# EAGLE board SWD_PROGRAMMER (EAGLE 6.5.0)
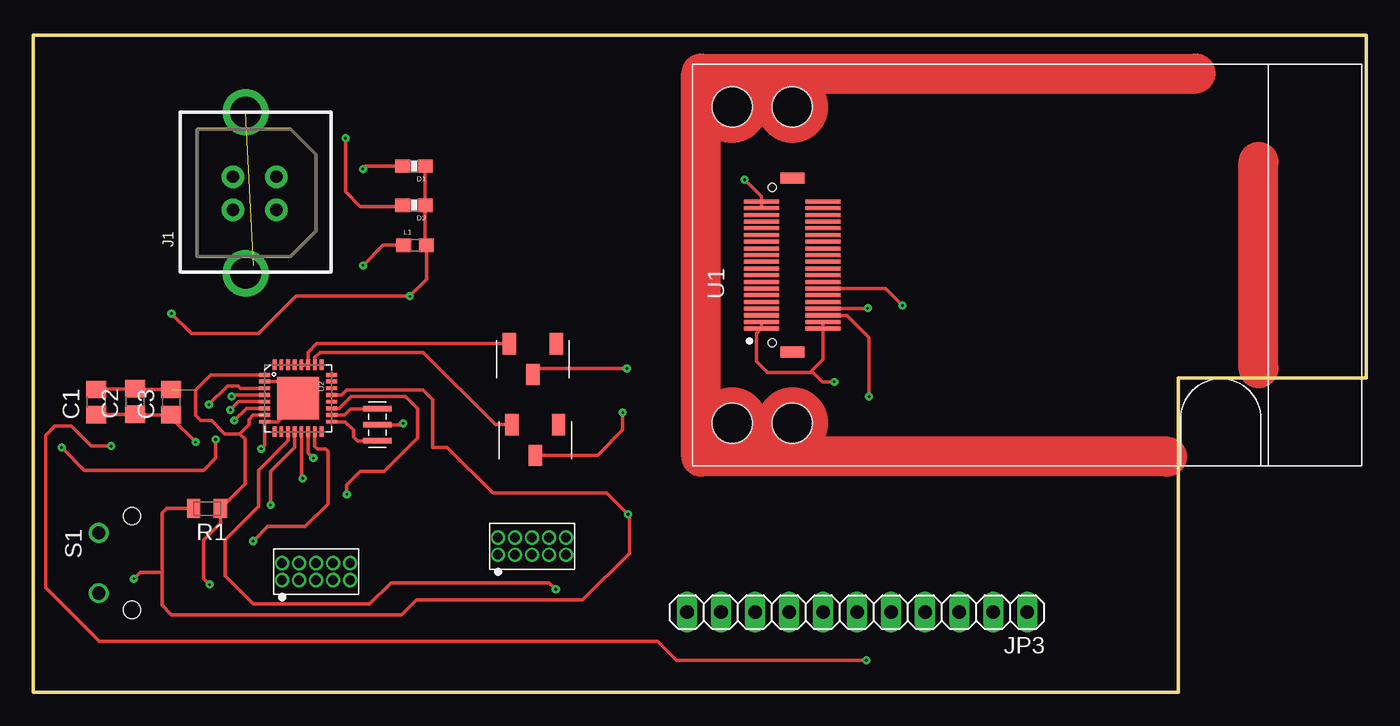
[diagram p0: board, top side]
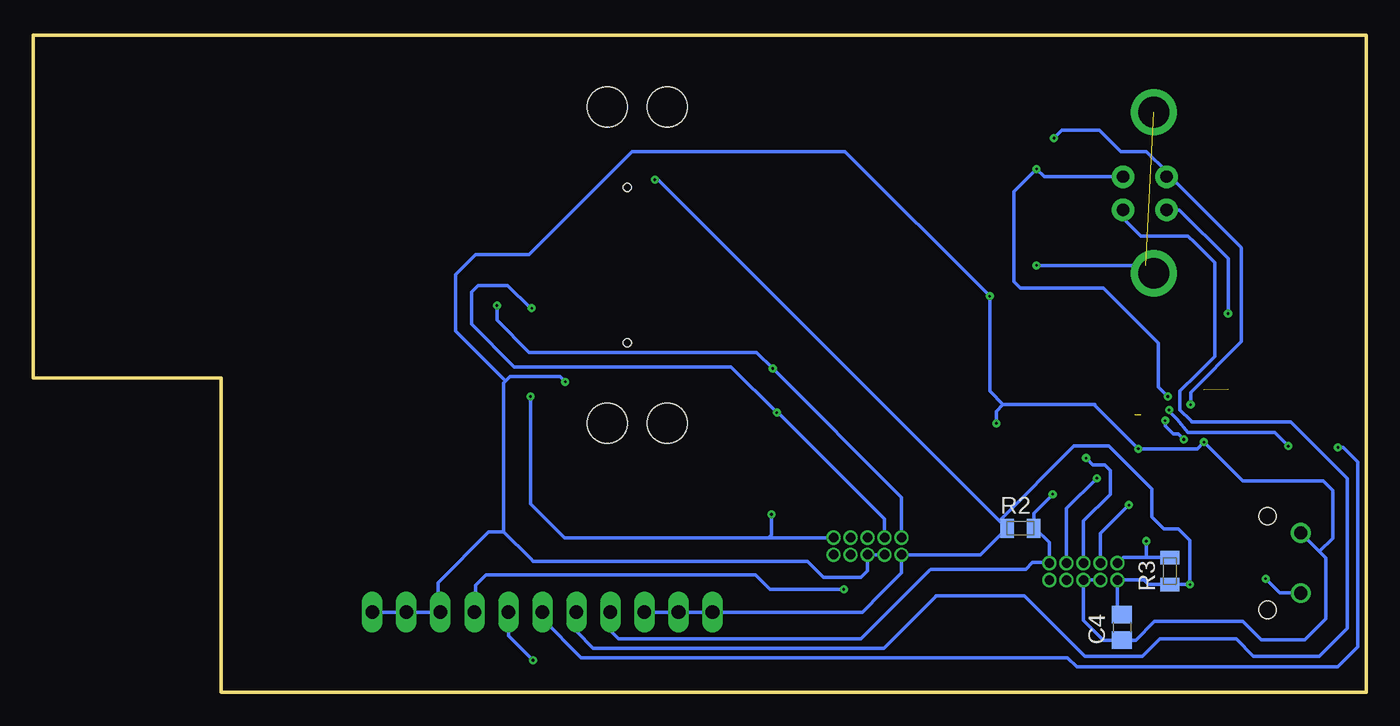
[diagram p1: board, bottom side, seen from below]

Size 99.5 x 49.1 mm. Coordinates in mm from the lower left corner, seen from the top.
Outline: 0,49.1 99.5,49.1 99.5,23.5 85.5,23.5 85.5,0 0,0 0,49.1
Copper layers (1*16): Top 0.035559375mm / dielectric 1.47mm / Bottom 0.035559375mm
Design rules "Codeshelf_Standard": minimum track width 0.2mm, minimum drill 0.25mm, track to track 0.2mm, track to pad 0.2mm, pad to pad 0.2mm, via to via 0.2mm, smd to smd 0mil, copper to edge 0.4mm, drill to drill 0.5mm, minimum pad ring 0.15mm, minimum via ring 0.2mm, stop-mask expansion 0.05mm, vias tented up to drill 0.5mm, thermal gap 0.25mm

## Footprints (pad centres in the part's own frame; a part is rotated, then mirrored left to right if it is on the bottom)
C0805 = smd 1.3 x 1.5: 1 -0.95,0; 2 0.95,0
0603-RES = smd 1.1 x 1: 1 -0.85,0; 2 0.85,0
USB-B-PTH-VERTICAL = drill 0.92 pad 1.676: D+ 4.826,3.95; D- 4.826,7.2; GND 7.315,3.95; VBUS 7.315,7.2 | drill 2.3: P$1 0,4.9; P$2 12.04,4.9
2X5HDR = drill 0.7 pad 1: P$1 -2.54,-0.67; P$2 -2.54,0.6; P$3 -1.27,-0.67; P$4 -1.27,0.6; P$5 0,-0.67; P$6 0,0.6; P$7 1.27,-0.67; P$8 1.27,0.6; P$9 2.54,-0.67; P$10 2.54,0.6
1X11 = drill 1.016 long: 1 -12.7,0; 2 -10.16,0; 3 -7.62,0; 4 -5.08,0; 5 -2.54,0; 6 0,0; 7 2.54,0; 8 5.08,0; 9 7.62,0; 10 10.16,0; 11 12.7,0
0603 = smd 1.1 x 1: 1 -0.85,0; 2 0.85,0
RF-C0805 = smd 1 x 1.4: 1 -1,0; 2 1,0
RA_BUTTON = drill 0.99: P$1 -2.25,0; P$2 2.25,0 | hole 1.3: -3.501,2.49; 3.501,2.49
CJS = smd 1 x 1.6: P$1 0,1.15; P$2 -1.75,-1.15; P$3 1.75,-1.15
BRAIN_OFFSET = smd 0.3 x 2.6: P$1 -4.75,2.3; P$2 -4.75,-2.3; P$3 -4.25,2.3; P$4 -4.25,-2.3; P$5 -3.75,2.3; P$6 -3.75,-2.3; P$7 -3.25,2.3; P$8 -3.25,-2.3; P$9 -2.75,2.3; P$10 -2.75,-2.3; P$11 -2.25,2.3; P$12 -2.25,-2.3; P$13 -1.75,2.3; P$14 -1.75,-2.3; P$15 -1.25,2.3; P$16 -1.25,-2.3; P$17 -0.75,2.3; P$18 -0.75,-2.3; P$19 -0.25,2.3; P$20 -0.25,-2.3; P$21 0.25,2.3; P$22 0.25,-2.3; P$23 0.75,2.3; P$24 0.75,-2.3; P$25 1.25,2.3; P$26 1.25,-2.3; P$27 1.75,2.3; P$28 1.75,-2.3; P$29 2.25,2.3; P$30 2.25,-2.3; P$31 2.75,2.3; P$32 2.75,-2.3; P$33 3.25,2.3; P$34 3.25,-2.3; P$35 3.75,2.3; P$36 3.75,-2.3; P$37 4.25,2.3; P$38 4.25,-2.3; P$39 4.75,2.3; P$40 4.75,-2.3 | smd 0.8 x 1.8: P$41 -6.5,0; P$42 6.5,0 | hole 0.6: -5.8,1.5; 5.8,1.5 | hole 3: -11.8,4.5; 11.8,4.5; -11.8,0; 11.8,0
QFN-32 = smd 0.285 x 0.8: 1 -1.75,-2.5; 2 -1.25,-2.5; 3 -0.75,-2.5; 4 -0.25,-2.5; 5 0.25,-2.5; 6 0.75,-2.5; 7 1.25,-2.5; 8 1.75,-2.5; 17 1.75,2.5; 18 1.25,2.5; 19 0.75,2.5; 20 0.25,2.5; 21 -0.25,2.5; 22 -0.75,2.5; 23 -1.25,2.5; 24 -1.75,2.5 | smd 0.8 x 0.285: 9 2.5,-1.75; 10 2.5,-1.25; 11 2.5,-0.75; 12 2.5,-0.25; 13 2.5,0.25; 14 2.5,0.75; 15 2.5,1.25; 16 2.5,1.75; 25 -2.5,1.75; 26 -2.5,1.25; 27 -2.5,0.75; 28 -2.5,0.25; 29 -2.5,-0.25; 30 -2.5,-0.75; 31 -2.5,-1.25; 32 -2.5,-1.75 | smd 3.15 x 3.15: EP 0,0
CSTCE_G_A = smd 0.4 x 2.1: P$1 -1.2,0; P$2 0,0; P$3 1.2,0

## Placement (x,y rotation side)
C1  10uF  [C0805]  4.69,21.68 90 top
C2  1uF  [C0805]  7.59,21.73 90 top
C3  0.1uF  [C0805]  10.29,21.68 90 top
C4  0.1uF  [C0805]  18.22,4.87 90 bottom
D1  TVS0603  [0603-RES]  28.41,39.31 180 top
D2  TVS0603  [0603-RES]  28.41,36.39 180 top
J1  USB_B  [USB-B-PTH-VERTICAL]  10.94,43.35 270 top
JP1  [2X5HDR]  37.22,10.96 0 top
JP2  [2X5HDR]  21.1,9.06 0 top
JP3  [1X11]  61.5,6 180 top
L1  [0603]  28.49,33.4 0 top
R1  10k  [RF-C0805]  12.96,13.74 180 top
R2  10k  [RF-C0805]  25.81,12.26 0 bottom
R3  10k  [RF-C0805]  14.65,9.06 90 bottom
S1  RA_BUTTON  [RA_BUTTON]  4.87,9.67 270 top
SW1  CJS  [CJS]  37.29,24.9 180 top
SW2  CJS  [CJS]  37.46,18.85 180 top
U1  KW2_CPU_OFFSET  [BRAIN_OFFSET]  56.66,31.92 90 top
U2  KL20PAD  [QFN-32]  19.76,21.97 270 top
X1  CSTCE8M00G55-R0  [CSTCE_G_A]  25.68,19.99 90 top

## Library data of the parts
C1 = GW-devices; MFGN: Murata; MFGP: GRM219R61E106KA12D
C2 = GW-devices; MFGN: TDK; MFGP: C2012X5R1E105K125AA
C3 C4 = GW-devices; MFGN: TDK; MFGP: C2012X5R1H104K085AA
D1 D2 = SparkFun; MFGN: Eaton Bussman; MFGP: 0603ESDA2-TR2
J1 = KW2; MFGN: Harwin; MFGP: M701-330442
JP1 JP2 = KW2; MFGN: Sullins Connector Solutions; MFGP: GRPB052VWVN-RC
JP3 = pinhead
L1 = SparkFun; MFGN: TDK; MFGP: MPZ1608S331ATA00
R1-R3 = GW-devices; MFGN: Vishay Dale; MFGP: CRCW080510K0FKEA
S1 U1 X1 = KW2
SW1 SW2 = KW2; MFGN: Copal Electronics Inc; MFGP: CJS-1200TA
U2 = KW2; MFGN: Freescale; MFGP: MK20DX128VFM5

## Nets
+3V3: C1.2 C2.2 C3.2 C4.2 JP1.P$1 JP2.P$1 JP3.9 JP3.10 JP3.11 R1.1 R2.1 R3.1 U1.P$37 U1.P$39 U2.1 U2.7
CLK: JP2.P$4 U2.12
GND [GND]: C1.1 C2.1 C3.1 C4.1 D1.1 D2.1 J1.GND JP1.P$3 JP1.P$5 JP2.P$3 JP2.P$5 JP3.1 JP3.2 JP3.3 L1.2 S1.P$1 U1.P$1 U1.P$2 U1.P$3 U1.P$4 U2.2 U2.8 U2.EP X1.P$2
JRST: JP2.P$10 JP3.8 R2.2 U2.19
N$1: SW1.P$3 U2.27 U2.28
N$2: J1.VBUS JP3.7
N$3: JP3.4 U2.11
N$4: U2.17 X1.P$1
N$5: J1.P$1 J1.P$2 L1.1
N$6: U2.18 X1.P$3
N$7: JP3.5 U2.5
N$8: JP3.6 U2.6
N$35: D1.2 J1.D- U2.4
N$36: D2.2 J1.D+ U2.3
RST: JP1.P$10 R1.2 S1.P$2 U1.P$6 U2.21
SWD_CLK: JP1.P$4 SW2.P$1 U1.P$8
SWD_DIO: JP1.P$2 SW1.P$1 U1.P$14
SWD_TGT_CLK: SW2.P$3 U2.26
TDI: JP2.P$8 U2.13
TDO: JP2.P$6 U2.14
TMS: JP2.P$2 R3.2 U2.15

## Tracks (layer width: path | path; a pad name or v marks a point on that pad's centre or on a via)
+3V3  (via drill 0.2)  (2 unrouted)
  Top 0.254: U2.1 13.22,23.72 12.13,22.63 12.1,22.6 12.1,22.5 12.1,20.7 12.5,20.3 13.3,20.3 14.1,19.5 14.28,19.32 15.4,19.32 | v13.14,8.06 12.7,8.5 12.7,11.4 13.96,12.66 R1.1 15.8,15.58 15.8,18.92 15.4,19.32 | U1.P$39 U1.P$37 54.36,37.04 v53.1,38.3 | 16.8,20.72 16.42,20.72 16.1,20.4 16.1,20.02 15.4,19.32 | C1.2 4.74,22.68 C2.2 7.64,22.63 C3.2
  Bottom 0.254: v53.1,38.3 52.85,38.3 27.38,12.83 | 27.38,12.83 R2.1 28.78,10.29 JP1.P$1 | 27.38,12.83 21.8,18.4 19.2,18.4 16,15.2 16,13.1 15.1,12.2 14,12.2 13.14,11.34 v13.14,8.06 R3.1 16.26,8.06 16.3,8.1 16.59,8.39 JP2.P$1 18.56,6.16 C4.2 | 34.6,10.21 JP1.P$1 | JP3.9 JP3.10 JP3.11 37.6,6 36.1,7.5 34.68,8.92 JP1.P$1
CLK  (via drill 0.2)
  Top 0.254: v17.7,14 17.7,16.5 19.51,18.31 U2.12
  Bottom 0.254: JP2.P$4 19.83,11.87 v17.7,14
GND  (via drill 0.2)
  Top 0.254: D1.1 D2.1 29.26,33.48 L1.2 29.34,30.84 v28.1,29.6 19.6,29.6 16.8,26.8 11.8,26.8 v10.3,28.3 | 19,22.7 19.03,22.7 19.03,22.47 19.25,22.25 | 18.9,21.2 18.99,21.2 18.99,21.49 19.25,21.75 | v17,18.2 17.26,18.46 U2.8 18.22,20.22 19.25,21.25 19.25,21.75 | U1.P$2 U1.P$4 58.96,24.86 58.1,24 | U1.P$3 U1.P$1 54,26.81 54,24.7 54.8,23.9 58,23.9 58.1,24 | X1.P$2 27.49,19.99 v27.6,20.1 | 58.1,24 58.9,23.2 v59.8,23.2 | C1.1 4.74,20.78 C2.1 7.64,20.73 C3.1 10.29,20.51 v12.1,18.7 | 19.25,22.25 19.5,22 | 19.25,21.75 19.5,22 | U2.2 19.25,23.22 19.25,22.25 | U2.EP 19.53,21.97 19.5,22
  Bottom 0.254: JP2.P$3 JP2.P$5 21.1,5.4 19.6,3.9 18.24,3.9 C4.1 18.2,3.9 17.2,3.9 15.8,5.3 9.2,5.3 7.82,3.92 4.58,3.92 3,5.5 3,10.05 3.48,10.52 | J1.GND 13.93,36.03 10.3,32.4 v10.3,28.3 | 27.1,21.5 27.6,21 v27.6,20.1 | v59.8,23.2 60.2,23.6 63.9,23.6 64.2,23.3 | 64.2,23.3 64.4,23.1 64.4,12 | 64.4,12 62.4,10 62.2,9.8 41.7,9.8 40.5,8.6 37.7,8.6 37.22,9.08 JP1.P$5 JP1.P$3 | 27.1,21.5 28.1,22.5 v28.1,29.6 38.9,40.4 54.8,40.4 62.5,32.7 66.5,32.7 68,31.2 68,27 64.3,23.3 64.2,23.3 | 27.1,21.5 20.23,21.5 20.23,21.43 v17,18.2 12.6,18.2 v12.1,18.7 9.2,15.8 3.2,15.8 2.5,15.1 2.5,12.71 2.5,11.5 3.48,10.52 | 3.48,10.52 S1.P$1 | JP3.1 JP3.2 JP3.3 69.3,6.18 69.3,8.2 65.5,12 64.4,12
JRST  (via drill 0.2)
  Top 0.254: v23.4,14.8 23.4,15.5 24.4,16.5 26.2,16.5 28.7,19 28.7,21.2 27.8,22.1 23.7,22.1 22.82,21.22 U2.19
  Bottom 0.254: v23.4,14.8 24.81,13.39 R2.2 24.71,12.26 23.64,11.19 JP2.P$10 23.68,9.7 24.9,9.7 25.4,9.2 31.4,9.2 32.5,9.2 32.6,9.1 37.7,4 55.8,4 56.42,4.62 JP3.8
N$1
  Top 0.254: SW1.P$3 21.15,26.05 20.5,25.4 U2.27 U2.28
N$2
  Bottom 0.254: J1.VBUS 18.14,35.44 16.8,34.1 13.3,34.1 12.8,33.6 12.6,33.4 11.3,32.1 11.3,31.4 11.3,25.1 12.6,23.8 13.9,22.5 13.9,21.3 13.9,21.1 13.1,20.3 13,20.2 12.2,20.2 5.6,20.2 1.4,16 1.4,4.8 3.5,2.7 8.4,2.7 9.7,4 15.4,4 16.7,2.7 21,2.7 21.3,3 25.5,7.2 25.7,7.2 29.6,7.2 32.1,7.2 32.2,7.1 36,3.3 57.7,3.3 58.96,4.56 JP3.7
N$3  (via drill 0.2)
  Top 0.254: U2.11 19.01,18.81 16.8,16.6 16.8,13.9 14.3,11.4 14.3,8.7 16.4,6.6 25.1,6.6 26.7,8.2 36.6,8.2 38.5,8.2 v39,7.7
  Bottom 0.254: v39,7.7 44.5,7.7 45.6,8.8 65.7,8.8 66.5,8 66.5,6.08 JP3.4
N$4
  Top 0.254: U2.17 23.28,20.22 23.9,19.6 23.9,19.1 24.21,18.79 X1.P$1
N$5  (via drill 0.2)  (1 unrouted)
  Top 0.254: L1.1 26.1,33.4 v24.6,31.9
  Bottom 0.254: v24.6,31.9 16.43,31.9 J1.P$2
N$6
  Top 0.254: X1.P$3 23.69,21.19 23.22,20.72 U2.18
N$7  (via drill 0.2)
  Top 0.254: U2.5 15.32,21.72 v14.7,21.1 | v62.2,2.4 48,2.4 46.6,3.8 4.9,3.8 0.9,7.8 0.9,9.7 0.9,19.2 1.6,19.9 2.8,19.9 3.4,19.3 4.3,18.4 v5.8,18.4
  Bottom 0.254: v14.7,21.1 14.7,21 14.1,20.4 13.3,19.4 6.8,19.4 v5.8,18.4 | v62.2,2.4 64.04,4.24 JP3.5
N$8  (via drill 0.2)
  Top 0.254: U2.6 15.92,21.22 v15,20.3 | v13.6,18.9 13.6,17.5 12.7,16.6 8.6,16.6 4.4,16.6 3.8,16.6 v2.1,18.3
  Bottom 0.254: JP3.6 61.5,5.5 58.6,2.6 22.3,2.6 21.6,1.9 2.1,1.9 0.6,3.4 0.6,17.2 1.7,18.3 v2.1,18.3 | v15,20.3 15,19.9 14.4,19.3 14,19.3 v13.6,18.9
N$35  (via drill 0.2)
  Top 0.254: v24.6,39.1 24.81,39.31 D1.2 | U2.4 14.92,22.22 v14.8,22.1
  Bottom 0.254: J1.D- 24.02,38.52 v24.6,39.1 26.3,37.4 26.3,30.7 25.8,30.2 19.6,30.2 15.5,26.1 15.5,22.8 v14.8,22.1
N$36  (via drill 0.2)
  Top 0.254: D2.2 27.47,36.3 24.4,36.3 23.3,37.4 v23.3,41.4 | U2.3 15.48,22.72 15.3,22.9 14.5,22.9 v13.1,21.5
  Bottom 0.254: v23.3,41.4 22.7,42 19.9,42 18.3,40.4 16.4,40.4 14.89,38.89 J1.D+ 14.62,38.52 9.35,33.25 9.3,33.2 9.3,26.2 13.1,22.4 13.1,22.3 v13.1,21.5
RST  (via drill 0.2)
  Top 0.254: R1.2 9.94,13.74 9.7,13.5 9.6,13.4 9.6,8.97 | 9.6,8.97 9.6,6.5 10.3,5.8 27.1,5.8 27.5,5.8 28.6,6.9 41,6.9 44.5,10.4 44.5,13.2 v44.4,13.3 42.8,14.9 34.3,14.9 30.9,18.3 29.8,18.3 29.8,21.9 29.1,22.6 23.4,22.6 23.02,22.22 U2.21 | v62.4,22.1 62.4,26.5 60.73,28.17 U1.P$6 | 9.6,8.97 7.97,8.97 v7.5,8.5
  Bottom 0.254: JP1.P$10 44.6,11.56 | 44.6,11.56 59.86,11.56 62.4,14.1 v62.4,22.1 | v44.4,13.3 44.4,11.76 44.6,11.56 | v7.5,8.5 6.42,7.42 S1.P$2
SWD_CLK  (via drill 0.2)
  Top 0.254: U1.P$8 62.27,28.67 v62.3,28.7 | v44,20.9 44,19.6 42.1,17.7 SW2.P$1
  Bottom 0.254: v62.3,28.7 62.4,28.7 64.1,30.4 66.3,30.4 66.8,29.9 66.8,27.5 63.6,24.3 47.4,24.3 v44,20.9 43.9,20.9 35.95,12.95 JP1.P$4
SWD_DIO  (via drill 0.2)
  Top 0.254: SW1.P$1 37.74,24.2 v44.3,24.2 | v64.9,28.9 63.63,30.17 U1.P$14
  Bottom 0.254: v64.9,28.9 64.9,27.8 62.5,25.4 45.5,25.4 v44.3,24.2 34.68,14.58 JP1.P$2
SWD_TGT_CLK
  Top 0.254: SW2.P$3 34.5,20 29.1,25.4 21.4,25.4 21.01,25.01 U2.26
TDI  (via drill 0.2)
  Top 0.254: v20.1,16 20.01,16.09 U2.13
  Bottom 0.254: JP2.P$8 22.37,13.73 v20.1,16
TDO  (via drill 0.2)
  Top 0.254: U2.14 20.51,17.89 v20.9,17.5
  Bottom 0.254: JP2.P$6 21.1,12.8 19.1,14.8 19.1,16.6 19.5,17 20.4,17 v20.9,17.5
TMS  (via drill 0.2)
  Top 0.254: v16.4,11.3 17.5,12.4 20.3,12.4 22,14.1 22,18 21.8,18.2 21.2,18.2 21.01,18.39 U2.15
  Bottom 0.254: JP2.P$2 18.12,10.1 16.4,10.1 | 16.4,10.1 14.69,10.1 R3.2 | 16.4,10.1 v16.4,11.3